# Altium PCB ultrazohm_digital_voltage_3U_1vxx.PcbDoc (part 1 of 4)
Units mm, origin at the board's own origin, x right, y up, seen from the top; angles counter-clockwise.
Board outline 155.99 x 100 mm, 4 copper layers (Top Layer, Layer 1, Layer 2, Bottom Layer), stack 0.98 mm thick; 148 components, 295 nets, 1106 pads, 423 vias.
Unrouted connection lines stored in the file: 171.
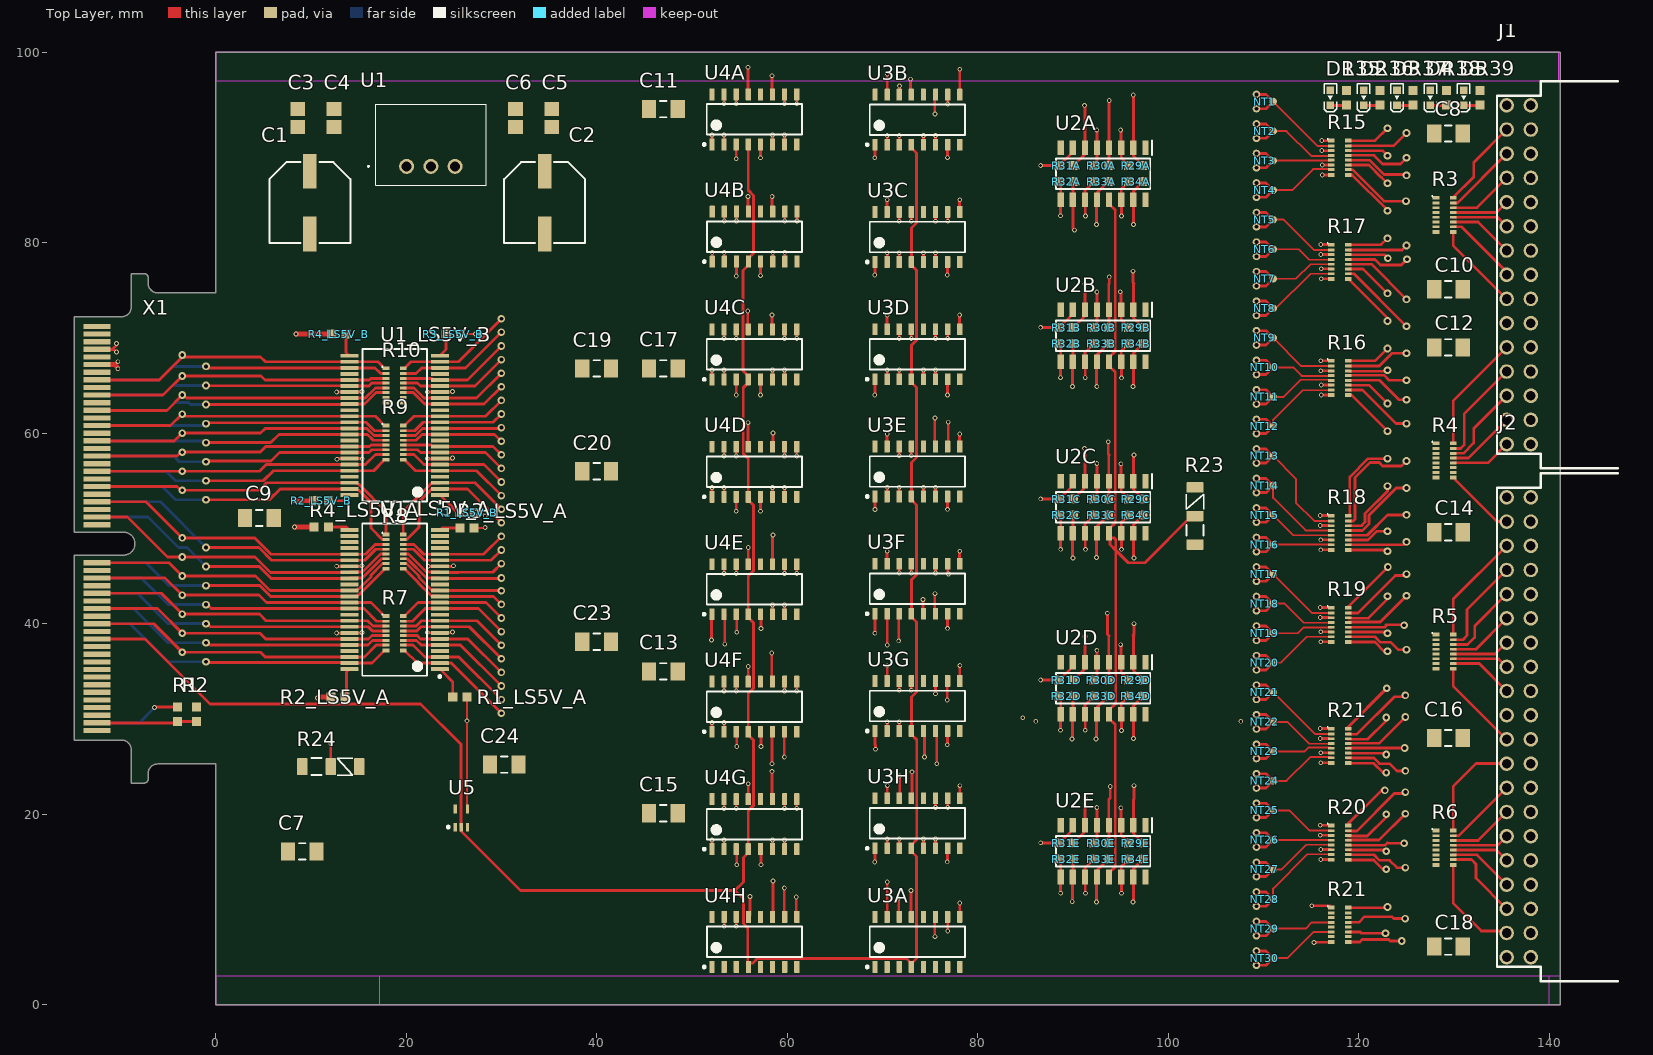
[diagram p0: Top Layer view]
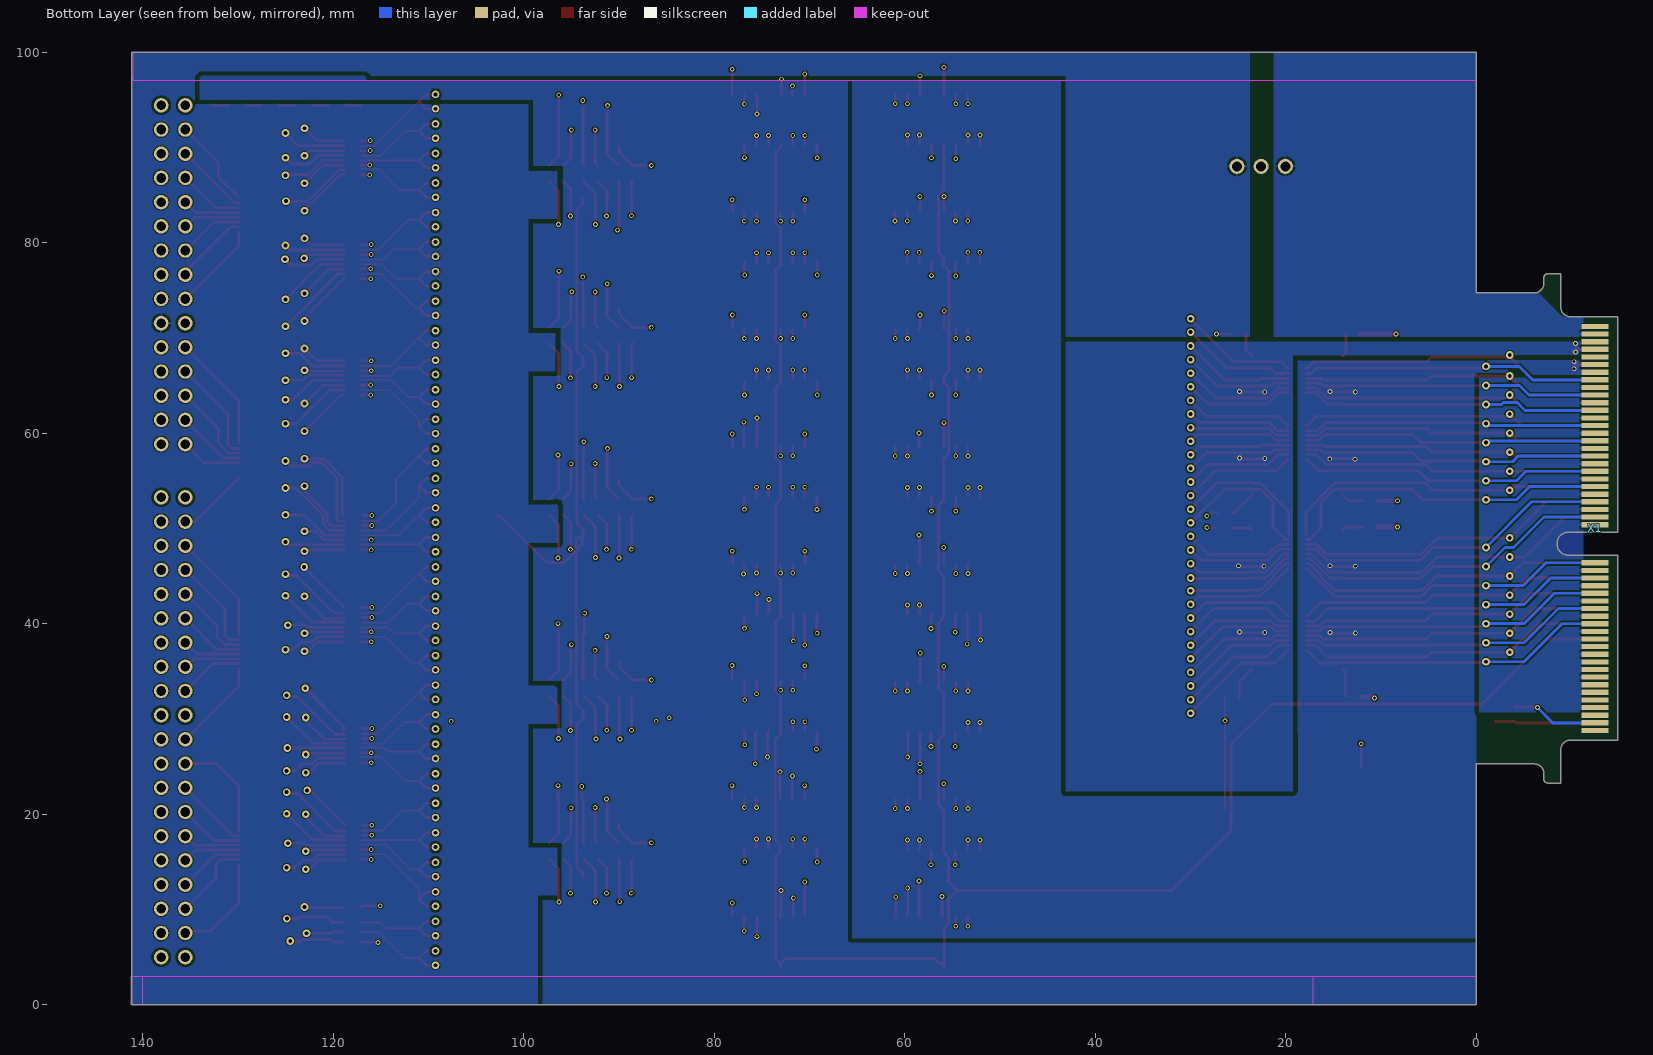
[diagram p1: Bottom Layer view, seen from below]
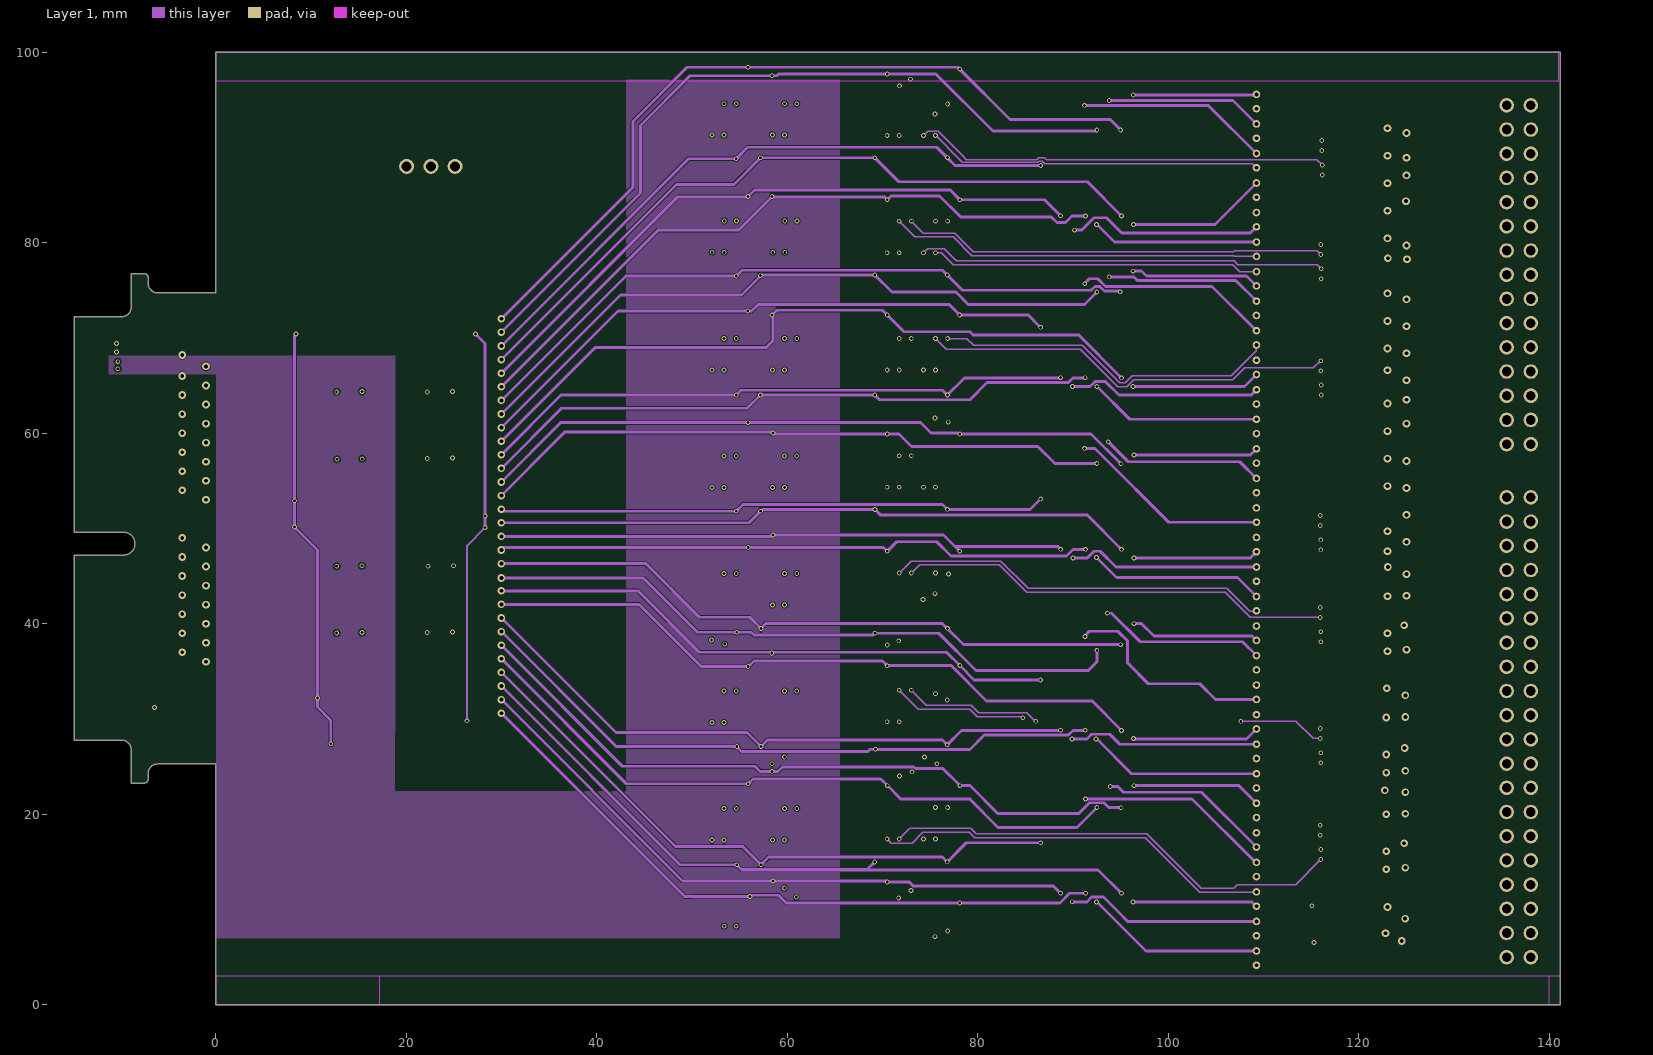
[diagram p2: Layer 1]
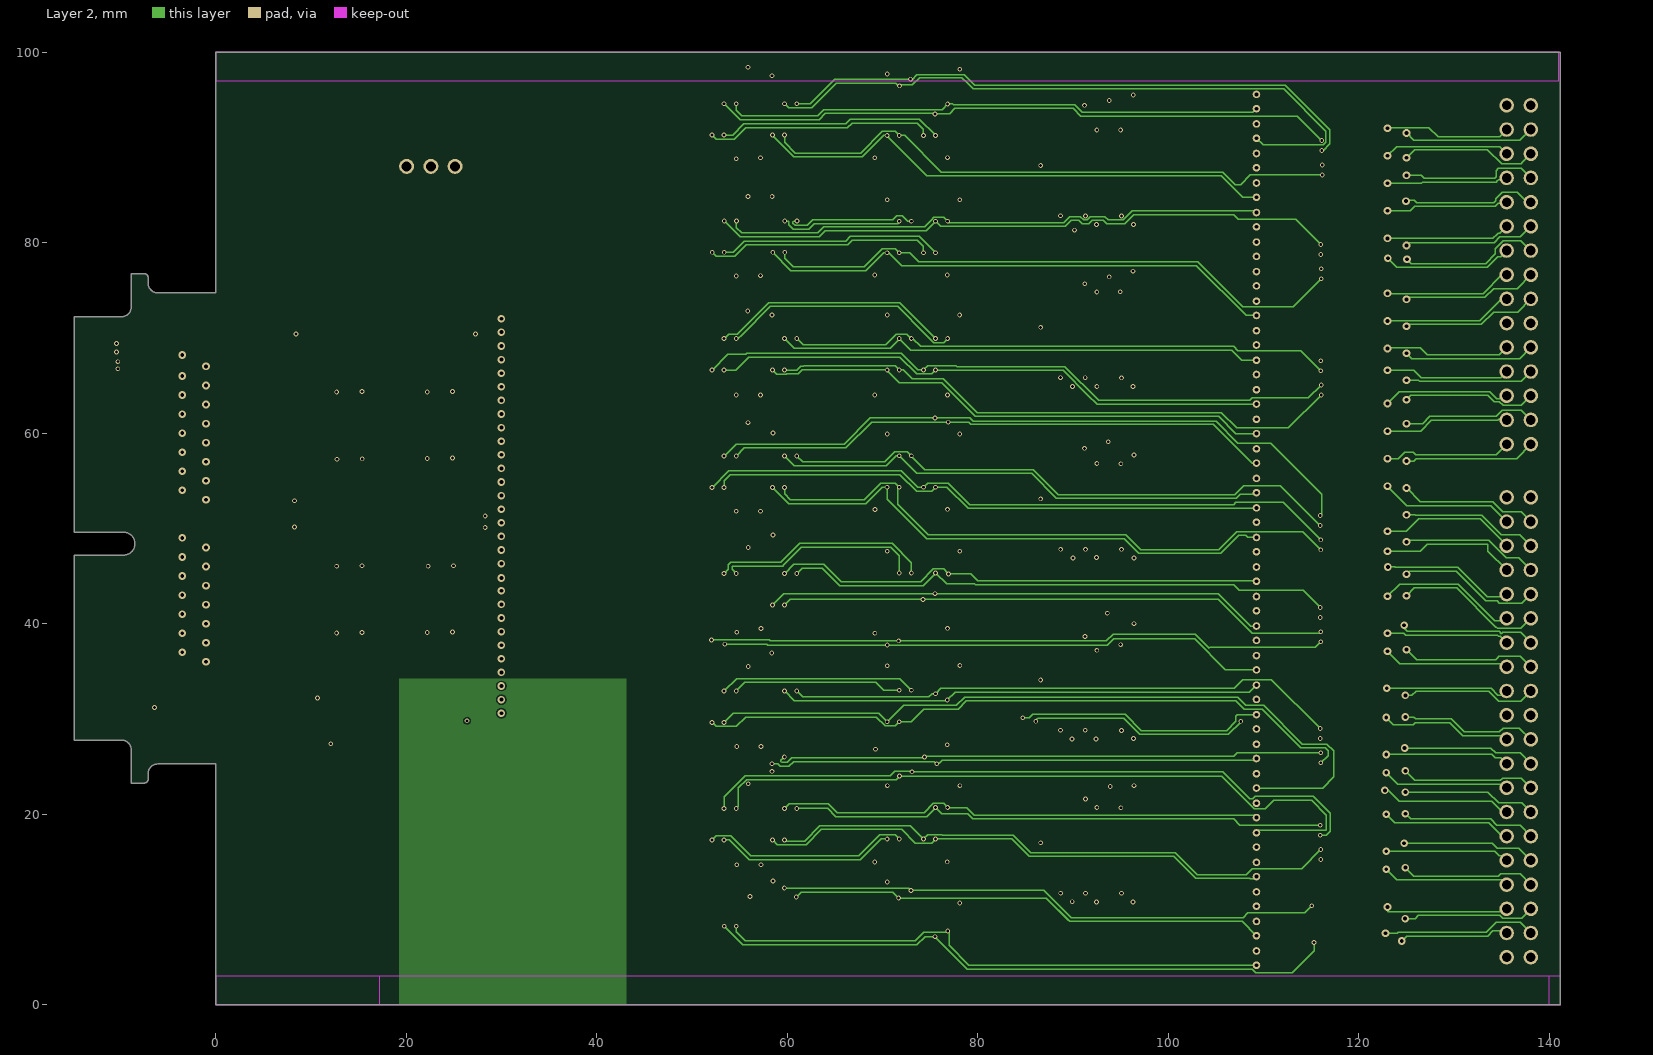
[diagram p3: Layer 2]
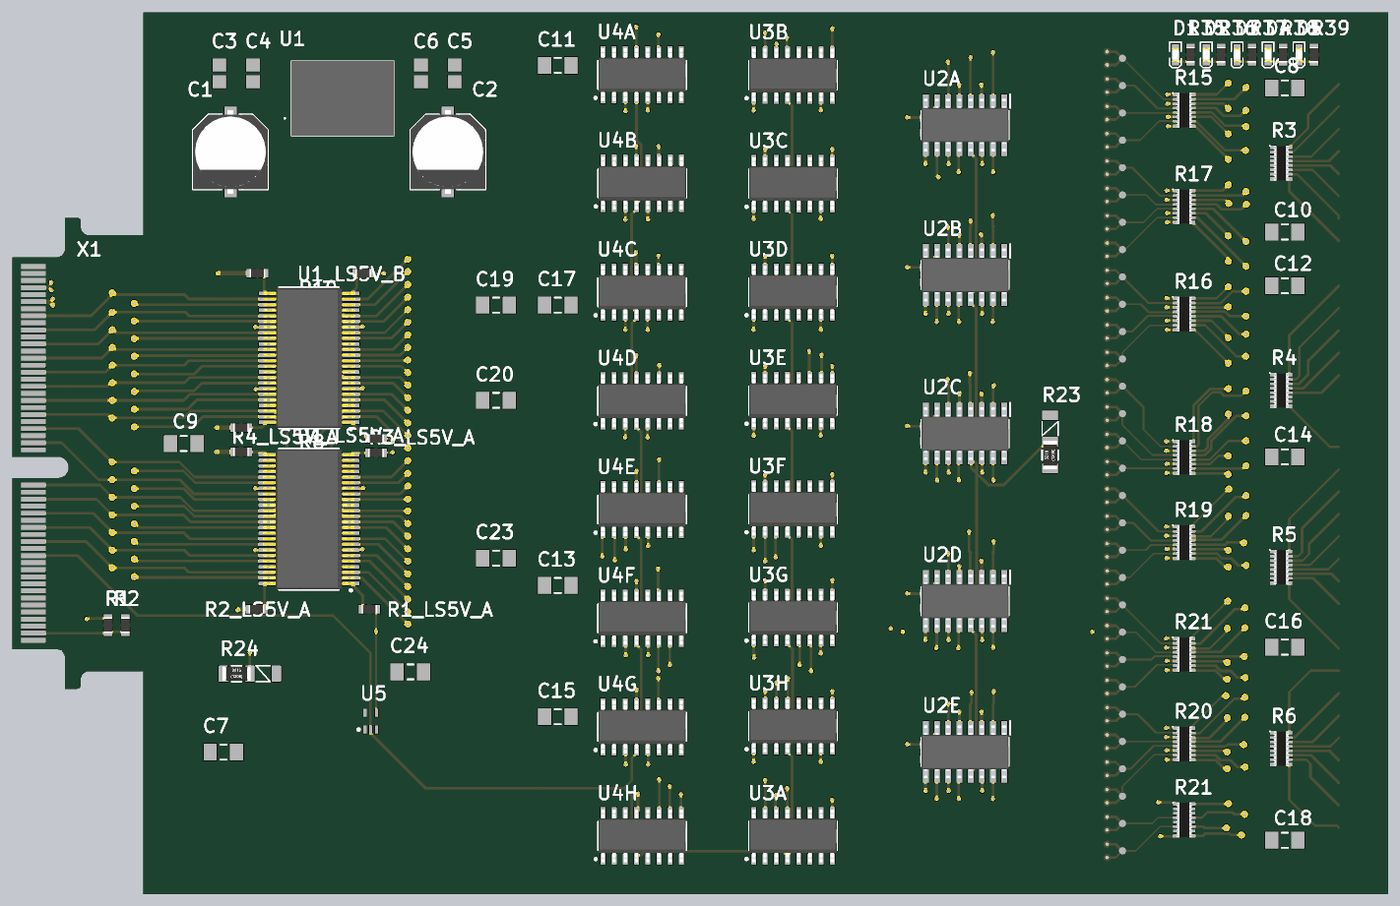
[diagram p6: 3D render of the assembled board from above, using the file's embedded part models]

## Layer stack, top to bottom
Top Solder: solder mask 0.0102, Solder Resist, Dk 3.5
Top Layer: signal copper 0.035
Dielectric 2: prepreg 0.115, FR-4, Dk 4.4
Dielectric 4: prepreg 0.115, FR-4, Dk 4.4
Layer 1: signal copper 0.035
Dielectric 1: core 0.38, Core-036, Dk 4.4
Layer 2: signal copper 0.035
Dielectric 5: prepreg 0.115, FR-4, Dk 4.4
Dielectric 3: prepreg 0.115, FR-4, Dk 4.4
Bottom Layer: signal copper 0.035
Bottom Solder: solder mask 0.0102, Solder Resist, Dk 3.5

## Board outline
-14.853,27.775 -9.853,27.775 cw(c-9.853,26.775) -8.853,26.775 -8.853,23.275 -7.473,23.275 ccw(c-7.473,23.675) -7.073,23.675 -7.073,24.275 cw(c-6.073,24.275) -6.073,25.275 0,25.275 0,0 141.141,0 141.141,100 0.031,100 0.031,74.725 -6.073,74.725 cw(c-6.073,75.725) -7.073,75.725 -7.073,76.325 ccw(c-7.473,76.325) -7.473,76.725 -8.853,76.725 -8.853,73.225 cw(c-9.853,73.225) -9.853,72.225 -14.853,72.225 -14.853,49.6 -9.653,49.6 cw(c-9.653,48.4) -9.653,47.2 -14.853,47.2

## Design rules (kind name [scope] priority, off if disabled: settings)
AssemblyTestPointUsage [InNetClass('3V3_SingleEnded') or InNetClass('5V_SingleEnded') or InNetClass('15V_SingleEnded') or InNetClass('DifferentialSignals')] p1:
Clearance Clearance_Differential [InNetClass('DifferentialSignals')] p1: gap=0.1 ignorepadtopadclearanceinfootprint=FALSE except(0: Arc-Hole Track-Hole SMDPad-Hole THPad-Hole Via-Hole Fill-Hole Poly-Hole Region-Hole Text-Hole; 0.3: SMDPad-Via; 0.4: THPad-Via)
Clearance Clearance_Power [InNetClass('Power')] p2: gap=0.1 ignorepadtopadclearanceinfootprint=FALSE except(0: Arc-Hole Track-Hole SMDPad-Hole THPad-Hole Via-Hole Fill-Hole Poly-Hole Region-Hole Text-Hole; 0.15: Via-Poly; 0.2: Track-Poly; 0.25: THPad-Poly; 0.3: Fill-Poly Poly-Region; 0.5: Poly-Poly)
Clearance [All] p3: gap=0.1 ignorepadtopadclearanceinfootprint=FALSE except(0: Arc-Hole Track-Hole SMDPad-Hole THPad-Hole Via-Hole Fill-Hole Poly-Hole Region-Hole Text-Hole; 0.3: SMDPad-Via; 0.4: THPad-Via)
ComponentClearance [All] p1: gap=0.1 collisioncheckmode=3 verticalgap=0.1 showdistances=FALSE
DiffPairsRouting [InNetClass('DifferentialSignals')] p1: maxlimit=0.25 minlimit=0.127 mostfreqgap=0.25 toplayer_maxgap=0.127 toplayer_prefgap=0.127 toplayer_minwidth=0.285 toplayer_maxwidth=0.285 toplayer_prefwidth=0.285 midlayer1_minwidth=0.069 midlayer1_maxwidth=0.15 midlayer1_prefwidth=0.15 midlayer2_mingap=0.165 midlayer2_minwidth=0.1 midlayer2_maxwidth=0.15 midlayer2_prefwidth=0.15 bottomlayer_maxgap=0.127 bottomlayer_prefgap=0.127 bottomlayer_minwidth=0.285 bottomlayer_maxwidth=0.285 bottomlayer_prefwidth=0.285 impedanceprofiledriven=TRUE impedanceprofileid={5F7DE71B-7B0B-4CDE-8AE7-8AD61221F3A5} impedanceprofilevalue=100.000000 maxuncoupledlength=12.7
FanoutControl Fanout_Power [InNetClass('Power') or InNet('ENABLE')] p1: bgadir=Out bgaviamode=Centered fanoutstyle=Auto fanoutdirection=None viagrid=0.025
FanoutControl Fanout_RS422 [InNetClass('DifferentialSignals')] p2: bgadir=Out bgaviamode=Closest fanoutstyle=Rows fanoutdirection=OutOnly viagrid=0.025
FanoutControl Fanout_BGA [IsBGA] p3 off: bgadir=Out bgaviamode=Centered fanoutstyle=Auto fanoutdirection=Alternating viagrid=0.025 // Fanout_BGA (Default Rule)
FanoutControl Fanout_LCC [IsLCC] p4 off: bgadir=Out bgaviamode=Centered fanoutstyle=Auto fanoutdirection=Alternating viagrid=0.025 // Fanout_LCC (Default Rule)
FanoutControl Fanout_SOIC [IsSOIC] p5 off: bgadir=Out bgaviamode=Centered fanoutstyle=Auto fanoutdirection=Alternating viagrid=0.025 // Fanout_SOIC (Default Rule)
FanoutControl Fanout_Small [(CompPinCount < 5)] p6 off: bgadir=Out bgaviamode=Centered fanoutstyle=Auto fanoutdirection=OutThenIn viagrid=0.025 // Fanout_Small (Default Rule)
FanoutControl Fanout_Default [All] p7: bgadir=NE bgaviamode=Closest fanoutstyle=Rows fanoutdirection=InOnly viagrid=0.025 // Fanout_Default (Default Rule)
Height [All] p1: minheight=0 maxheight=50 prefheight=12.7
HoleSize [All] p1: absolutevalues=TRUE maxlimit=4 minlimit=0.025 maxpercent=80.000 minpercent=20.000
PolygonConnect PolygonConnect_Therm [HoleSize > 2.6] p1: connectstyle=Direct reliefconductorwidth=0.254 reliefentries=4 polygonreliefangle="90 Angle" airgapwidth=0.254
PolygonConnect PolygonConnect_via [InPadClass('pad') or IsVia] p2: connectstyle=Direct reliefconductorwidth=0.254 reliefentries=4 polygonreliefangle="90 Angle" airgapwidth=0.254
PolygonConnect [All] p3: connectstyle=Relief reliefconductorwidth=0.2 reliefentries=4 polygonreliefangle="90 Angle" airgapwidth=0.25
RoomDefinition [InComponentClass('LS15VA') vs False] p1: confinementstyle=ConfineIn formatcopy=TRUE lockcomponents=FALSE outline 86,81 98.5,81 98.5,93.6 86,93.6
RoomDefinition RoomDefinition_4 [InComponentClass('LS15VE') vs False] p2: confinementstyle=ConfineIn formatcopy=TRUE lockcomponents=FALSE outline 86,9.9 98.5,9.9 98.5,22.5 86,22.5
RoomDefinition RoomDefinition_3 [InComponentClass('LS15VD') vs False] p3: confinementstyle=ConfineIn formatcopy=TRUE lockcomponents=FALSE outline 86,27 98.5,27 98.5,39.6 86,39.6
RoomDefinition RoomDefinition_2 [InComponentClass('LS15VC') vs False] p4: confinementstyle=ConfineIn formatcopy=TRUE lockcomponents=FALSE outline 86,46 98.5,46 98.5,58.6 86,58.6
RoomDefinition RoomDefinition_1 [InComponentClass('LS15VB') vs False] p5: confinementstyle=ConfineIn formatcopy=TRUE lockcomponents=FALSE outline 86,64 98.5,64 98.5,76.6 86,76.6
RoomDefinition RS422 [InComponentClass('Room Definition 11')] p6: confinementstyle=ConfineIn formatcopy=TRUE lockcomponents=FALSE outline 50.776,2.739 79.176,2.739 79.176,96.939 50.776,96.939
RoomDefinition X2_OutputConnector [InComponentClass('X2_OutputConnector')] p7: confinementstyle=ConfineIn formatcopy=TRUE lockcomponents=FALSE outline 129.17,2.264 147.966,2.264 147.966,97.006 129.17,97.006
RoomDefinition X1_top [InComponentClass('X1_top')] p8: confinementstyle=ConfineIn formatcopy=TRUE lockcomponents=FALSE outline -19.05,21.59 3.81,21.59 3.81,79.756 -19.05,79.756
RoomDefinition LS5V_B [InComponentClass('LS5V_B')] p9: confinementstyle=ConfineIn formatcopy=TRUE lockcomponents=FALSE outline 29.21,71.628 8.128,71.628 8.128,50.7 29.21,50.7
RoomDefinition LS5V_A [InComponentClass('LS5V_A')] p10: confinementstyle=ConfineIn formatcopy=TRUE lockcomponents=FALSE outline 29.464,51.61 7.112,51.61 7.112,30.85 29.464,30.85
RoomDefinition PS1 [InComponentClass('PS1')] p11: confinementstyle=ConfineIn formatcopy=TRUE lockcomponents=FALSE outline 4.319,78.157 39.879,78.157 39.879,95.937 4.319,95.937
RoutingLayers RoutingLayers_3V3Signals [InNetClass('3V3_SingleEnded')] p1 off: top layer_v5=TRUE mid layer 1_v5=TRUE mid layer 2_v5=TRUE bottom layer_v5=TRUE
RoutingLayers RoutingLayers_SingleEnded [InNetClass('15V_SingleEnded') or InNetClass('3V3_SingleEnded') or InNetClass('5V_SingleEnded')] p2 off: top layer_v5=TRUE mid layer 1_v5=TRUE mid layer 2_v5=TRUE bottom layer_v5=TRUE
RoutingLayers RoutingLayers_Differential [InNetClass('DifferentialSignals')] p3 off: top layer_v5=TRUE mid layer 1_v5=TRUE mid layer 2_v5=TRUE bottom layer_v5=FALSE
RoutingLayers [All] p4: top layer_v5=TRUE mid layer 1_v5=TRUE mid layer 2_v5=TRUE bottom layer_v5=TRUE
RoutingVias [All] p1: holewidth=0.3 width=0.5 viastyle="Through Hole" minholewidth=0.2 minwidth=0.4 maxholewidth=0.5 maxwidth=1
SolderMaskExpansion [All] p1: expansion=0.102
UnRoutedNet UnRoutedNet_Signals [InNetClass('15V_SingleEnded') or InNetClass('3V3_SingleEnded') or InNetClass('5V_SingleEnded') or InNetClass('DifferentialSignals')] p1: checkbadconnections=TRUE
UnRoutedNet [All] p2 off: checkbadconnections=TRUE
Width Width_Power [All] p1: maxlimit=10 minlimit=0.2 preferedwidth=0.3 minimp=50.000000 maximp=50.000000 favimp=50.000000
Width [All] p2: maxlimit=10 minlimit=0.1 preferedwidth=0.15 minimp=50.000000 maximp=50.000000 favimp=50.000000
18 further rules are at their usual default settings.

## Classes and differential pairs
component class LEDs: D1 D2 D3 D4 D5 R35 R36 R37 R38 R39
component class LS15VE: R29E R30E R31E R32E R33E R34E U2E
component class LS15VD: R29D R30D R31D R32D R33D R34D U2D
component class LS15VC: R29C R30C R31C R32C R33C R34C U2C
component class LS15VB: R29B R30B R31B R32B R33B R34B U2B
component class LS15VA: R29A R30A R31A R32A R33A R34A U2A
net class Power: 3V3 5V0 15V0 GND VIN
net class 15V_SingleEnded: DIG_O_15V_A1 DIG_O_15V_A2 DIG_O_15V_A3 DIG_O_15V_A4 DIG_O_15V_A5 DIG_O_15V_B1 DIG_O_15V_B2 DIG_O_15V_B3 DIG_O_15V_B4 DIG_O_15V_B5 DIG_O_15V_C1 DIG_O_15V_C2 DIG_O_15V_C3 DIG_O_15V_C4 DIG_O_15V_C5 DIG_O_15V_D1 DIG_O_15V_D2 DIG_O_15V_D3 DIG_O_15V_D4 DIG_O_15V_D5 DIG_O_15V_E1 DIG_O_15V_E2 DIG_O_15V_E3 DIG_O_15V_E4 DIG_O_15V_E5 DIG_O_15V_F1 DIG_O_15V_F2 DIG_O_15V_F3 DIG_O_15V_F4 DIG_O_15V_F5
net class 5V_SingleEnded: DIG_IO_5V_A1 DIG_IO_5V_A2 DIG_IO_5V_A3 DIG_IO_5V_A4 DIG_IO_5V_A5 DIG_IO_5V_B1 DIG_IO_5V_B2 DIG_IO_5V_B3 DIG_IO_5V_B4 DIG_IO_5V_B5 DIG_IO_5V_C1 DIG_IO_5V_C2 DIG_IO_5V_C3 DIG_IO_5V_C4 DIG_IO_5V_C5 DIG_IO_5V_D1 DIG_IO_5V_D2 DIG_IO_5V_D3 DIG_IO_5V_D4 DIG_IO_5V_D5 DIG_IO_5V_E1 DIG_IO_5V_E2 DIG_IO_5V_E3 DIG_IO_5V_E4 DIG_IO_5V_E5 DIG_IO_5V_F1 DIG_IO_5V_F2 DIG_IO_5V_F3 DIG_IO_5V_F4 DIG_IO_5V_F5
net class 3V3_SingleEnded: 1A1A 1A1B 1A2A 1A2B 1A3A 1A3B 1A4A 1A4B 1A5A 1A5B 1A6A 1A6B 1A7A 1A7B 1A8A 1A8B 2A1A 2A1B 2A2A 2A2B 2A3A 2A3B 2A4A 2A4B 2A5A 2A5B 2A6A 2A6B 2A7A 2A7B 2A8A 2A8B
net class DifferentialSignals: DIG_I_DIFF_A_N1 DIG_I_DIFF_A_N2 DIG_I_DIFF_A_N3 DIG_I_DIFF_A_N4 DIG_I_DIFF_A_N5 DIG_I_DIFF_A_N6 DIG_I_DIFF_A_N7 DIG_I_DIFF_A_N8 DIG_I_DIFF_A_P1 DIG_I_DIFF_A_P2 DIG_I_DIFF_A_P3 DIG_I_DIFF_A_P4 DIG_I_DIFF_A_P5 DIG_I_DIFF_A_P6 DIG_I_DIFF_A_P7 DIG_I_DIFF_A_P8 DIG_I_DIFF_B_N1 DIG_I_DIFF_B_N2 DIG_I_DIFF_B_N3 DIG_I_DIFF_B_N4 DIG_I_DIFF_B_N5 DIG_I_DIFF_B_N6 DIG_I_DIFF_B_N7 DIG_I_DIFF_B_P1 DIG_I_DIFF_B_P2 DIG_I_DIFF_B_P3 DIG_I_DIFF_B_P4 DIG_I_DIFF_B_P5 DIG_I_DIFF_B_P6 DIG_I_DIFF_B_P7 DIG_I_DIFF_C_N1 DIG_I_DIFF_C_N2 DIG_I_DIFF_C_N3 DIG_I_DIFF_C_N4 DIG_I_DIFF_C_N5 DIG_I_DIFF_C_N6 DIG_I_DIFF_C_N7 DIG_I_DIFF_C_N8 DIG_I_DIFF_C_P1 DIG_I_DIFF_C_P2 DIG_I_DIFF_C_P3 DIG_I_DIFF_C_P4 DIG_I_DIFF_C_P5 DIG_I_DIFF_C_P6 DIG_I_DIFF_C_P7 DIG_I_DIFF_C_P8 DIG_I_DIFF_D_N1 DIG_I_DIFF_D_N2 DIG_I_DIFF_D_N3 DIG_I_DIFF_D_N4 DIG_I_DIFF_D_N5 DIG_I_DIFF_D_N6 DIG_I_DIFF_D_N7 DIG_I_DIFF_D_P1 DIG_I_DIFF_D_P2 DIG_I_DIFF_D_P3 DIG_I_DIFF_D_P4 DIG_I_DIFF_D_P5 DIG_I_DIFF_D_P6 DIG_I_DIFF_D_P7 DIG_IO_N1 DIG_IO_N2 DIG_IO_N3 DIG_IO_N4 DIG_IO_N5 DIG_IO_N6 DIG_IO_N7 DIG_IO_N8 DIG_IO_N9 DIG_IO_N10 DIG_IO_N11 DIG_IO_N12 DIG_IO_N13 DIG_IO_N14 DIG_IO_N15 DIG_IO_N16 DIG_IO_N17 DIG_IO_N18 DIG_IO_N19 DIG_IO_N20 DIG_IO_N21 DIG_IO_N22 DIG_IO_N23 DIG_IO_N24 DIG_IO_N25 DIG_IO_N26 DIG_IO_N27 DIG_IO_N28 DIG_IO_N29 DIG_IO_N30 DIG_IO_P1 DIG_IO_P2 DIG_IO_P3 DIG_IO_P4 DIG_IO_P5 DIG_IO_P6 DIG_IO_P7 DIG_IO_P8 DIG_IO_P9 DIG_IO_P10 DIG_IO_P11 DIG_IO_P12 DIG_IO_P13 DIG_IO_P14 DIG_IO_P15 DIG_IO_P16 DIG_IO_P17 DIG_IO_P18 DIG_IO_P19 DIG_IO_P20 DIG_IO_P21 DIG_IO_P22 DIG_IO_P23 DIG_IO_P24 DIG_IO_P25 DIG_IO_P26 DIG_IO_P27 DIG_IO_P28 DIG_IO_P29 DIG_IO_P30
channel class TI_DS26C32AT: RS422_rec_H RS422_recA RS422_recB RS422_recC RS422_recD RS422_recE RS422_recF RS422_recG
net class UNTERM[1..30]: UNTERM1 UNTERM2 UNTERM3 UNTERM4 UNTERM5 UNTERM6 UNTERM7 UNTERM8 UNTERM9 UNTERM10 UNTERM11 UNTERM12 UNTERM13 UNTERM14 UNTERM15 UNTERM16 UNTERM17 UNTERM18 UNTERM19 UNTERM20 UNTERM21 UNTERM22 UNTERM23 UNTERM24 UNTERM25 UNTERM26 UNTERM27 UNTERM28 UNTERM29 UNTERM30
net class DIG_O_15V_F[1..5]: DIG_O_15V_F1 DIG_O_15V_F2 DIG_O_15V_F3 DIG_O_15V_F4 DIG_O_15V_F5
net class DIG_O_15V_E[1..5]: DIG_O_15V_E1 DIG_O_15V_E2 DIG_O_15V_E3 DIG_O_15V_E4 DIG_O_15V_E5
net class DIG_O_15V_D[1..5]: DIG_O_15V_D1 DIG_O_15V_D2 DIG_O_15V_D3 DIG_O_15V_D4 DIG_O_15V_D5
net class DIG_O_15V_C[1..5]: DIG_O_15V_C1 DIG_O_15V_C2 DIG_O_15V_C3 DIG_O_15V_C4 DIG_O_15V_C5
net class DIG_O_15V_B[1..5]: DIG_O_15V_B1 DIG_O_15V_B2 DIG_O_15V_B3 DIG_O_15V_B4 DIG_O_15V_B5
net class DIG_O_15V_A[1..5]: DIG_O_15V_A1 DIG_O_15V_A2 DIG_O_15V_A3 DIG_O_15V_A4 DIG_O_15V_A5
net class DIG_IO_P[1..30]: DIG_IO_P1 DIG_IO_P2 DIG_IO_P3 DIG_IO_P4 DIG_IO_P5 DIG_IO_P6 DIG_IO_P7 DIG_IO_P8 DIG_IO_P9 DIG_IO_P10 DIG_IO_P11 DIG_IO_P12 DIG_IO_P13 DIG_IO_P14 DIG_IO_P15 DIG_IO_P16 DIG_IO_P17 DIG_IO_P18 DIG_IO_P19 DIG_IO_P20 DIG_IO_P21 DIG_IO_P22 DIG_IO_P23 DIG_IO_P24 DIG_IO_P25 DIG_IO_P26 DIG_IO_P27 DIG_IO_P28 DIG_IO_P29 DIG_IO_P30
net class DIG_IO_N[1..30]: DIG_IO_N1 DIG_IO_N2 DIG_IO_N3 DIG_IO_N4 DIG_IO_N5 DIG_IO_N6 DIG_IO_N7 DIG_IO_N8 DIG_IO_N9 DIG_IO_N10 DIG_IO_N11 DIG_IO_N12 DIG_IO_N13 DIG_IO_N14 DIG_IO_N15 DIG_IO_N16 DIG_IO_N17 DIG_IO_N18 DIG_IO_N19 DIG_IO_N20 DIG_IO_N21 DIG_IO_N22 DIG_IO_N23 DIG_IO_N24 DIG_IO_N25 DIG_IO_N26 DIG_IO_N27 DIG_IO_N28 DIG_IO_N29 DIG_IO_N30
net class DIG_I_DIFF_D_P[1..7]: DIG_I_DIFF_D_P1 DIG_I_DIFF_D_P2 DIG_I_DIFF_D_P3 DIG_I_DIFF_D_P4 DIG_I_DIFF_D_P5 DIG_I_DIFF_D_P6 DIG_I_DIFF_D_P7
net class DIG_I_DIFF_D_N[1..7]: DIG_I_DIFF_D_N1 DIG_I_DIFF_D_N2 DIG_I_DIFF_D_N3 DIG_I_DIFF_D_N4 DIG_I_DIFF_D_N5 DIG_I_DIFF_D_N6 DIG_I_DIFF_D_N7
net class DIG_I_DIFF_C_P[1..8]: DIG_I_DIFF_C_P1 DIG_I_DIFF_C_P2 DIG_I_DIFF_C_P3 DIG_I_DIFF_C_P4 DIG_I_DIFF_C_P5 DIG_I_DIFF_C_P6 DIG_I_DIFF_C_P7 DIG_I_DIFF_C_P8
net class DIG_I_DIFF_C_N[1..8]: DIG_I_DIFF_C_N1 DIG_I_DIFF_C_N2 DIG_I_DIFF_C_N3 DIG_I_DIFF_C_N4 DIG_I_DIFF_C_N5 DIG_I_DIFF_C_N6 DIG_I_DIFF_C_N7 DIG_I_DIFF_C_N8
net class DIG_I_DIFF_B_P[1..7]: DIG_I_DIFF_B_P1 DIG_I_DIFF_B_P2 DIG_I_DIFF_B_P3 DIG_I_DIFF_B_P4 DIG_I_DIFF_B_P5 DIG_I_DIFF_B_P6 DIG_I_DIFF_B_P7
net class DIG_I_DIFF_B_N[1..7]: DIG_I_DIFF_B_N1 DIG_I_DIFF_B_N2 DIG_I_DIFF_B_N3 DIG_I_DIFF_B_N4 DIG_I_DIFF_B_N5 DIG_I_DIFF_B_N6 DIG_I_DIFF_B_N7
net class DIG_I_DIFF_A_P[1..8]: DIG_I_DIFF_A_P1 DIG_I_DIFF_A_P2 DIG_I_DIFF_A_P3 DIG_I_DIFF_A_P4 DIG_I_DIFF_A_P5 DIG_I_DIFF_A_P6 DIG_I_DIFF_A_P7 DIG_I_DIFF_A_P8
net class DIG_I_DIFF_A_N[1..8]: DIG_I_DIFF_A_N1 DIG_I_DIFF_A_N2 DIG_I_DIFF_A_N3 DIG_I_DIFF_A_N4 DIG_I_DIFF_A_N5 DIG_I_DIFF_A_N6 DIG_I_DIFF_A_N7 DIG_I_DIFF_A_N8
channel class TI_DS26C31T: RS4221 RS4222 RS4223 RS4224 RS4225 RS4226 RS4227
channel class ONSEMI_MC14504BDR2G: LS15V1 LS15V2 LS15V3 LS15V4 LS15V5
net class DIG_IO_5V_F[1..5]: DIG_IO_5V_F1 DIG_IO_5V_F2 DIG_IO_5V_F3 DIG_IO_5V_F4 DIG_IO_5V_F5
net class DIG_IO_5V_E[1..5]: DIG_IO_5V_E1 DIG_IO_5V_E2 DIG_IO_5V_E3 DIG_IO_5V_E4 DIG_IO_5V_E5
net class DIG_IO_5V_D[1..5]: DIG_IO_5V_D1 DIG_IO_5V_D2 DIG_IO_5V_D3 DIG_IO_5V_D4 DIG_IO_5V_D5
net class DIG_IO_5V_C[1..5]: DIG_IO_5V_C1 DIG_IO_5V_C2 DIG_IO_5V_C3 DIG_IO_5V_C4 DIG_IO_5V_C5
net class DIG_IO_5V_B[1..5]: DIG_IO_5V_B1 DIG_IO_5V_B2 DIG_IO_5V_B3 DIG_IO_5V_B4 DIG_IO_5V_B5
net class DIG_IO_5V_A[1..5]: DIG_IO_5V_A1 DIG_IO_5V_A2 DIG_IO_5V_A3 DIG_IO_5V_A4 DIG_IO_5V_A5
component class LS5V_A: R1_LS5V_A R2_LS5V_A R3_LS5V_A R4_LS5V_A U1_LS5V_A U3
component class LS5V_B: R1_LS5V_B R2_LS5V_B R3_LS5V_B R4_LS5V_B R26 U1_LS5V_B
channel class TI_SN74LVCH16T245: LevelShifter_3V3_1 LevelShifter_3V3_2
component class X1_top: R1 R2 X1
component class PS1: C1 C2 C3 C4 C5 C6 U1 U3
differential pair DIG_I_DIFF_C8: +DIG_I_DIFF_C_P8 -DIG_I_DIFF_C_N8
differential pair DIG_IO30: +DIG_IO_P30 -DIG_IO_N30
differential pair DIG_IO29: +DIG_IO_P29 -DIG_IO_N29
differential pair DIG_IO28: +DIG_IO_P28 -DIG_IO_N28
differential pair DIG_IO27: +DIG_IO_P27 -DIG_IO_N27
differential pair DIG_IO26: +DIG_IO_P26 -DIG_IO_N26
differential pair DIG_IO25: +DIG_IO_P25 -DIG_IO_N25
differential pair DIG_IO24: +DIG_IO_P24 -DIG_IO_N24
differential pair DIG_IO23: +DIG_IO_P23 -DIG_IO_N23
differential pair DIG_IO22: +DIG_IO_P22 -DIG_IO_N22
differential pair DIG_IO21: +DIG_IO_P21 -DIG_IO_N21
differential pair DIG_IO20: +DIG_IO_P20 -DIG_IO_N20
differential pair DIG_IO19: +DIG_IO_P19 -DIG_IO_N19
differential pair DIG_IO18: +DIG_IO_P18 -DIG_IO_N18
differential pair DIG_IO17: +DIG_IO_P17 -DIG_IO_N17
differential pair DIG_IO16: +DIG_IO_P16 -DIG_IO_N16
differential pair DIG_IO15: +DIG_IO_P15 -DIG_IO_N15
differential pair DIG_IO14: +DIG_IO_P14 -DIG_IO_N14
differential pair DIG_IO13: +DIG_IO_P13 -DIG_IO_N13
differential pair DIG_IO12: +DIG_IO_P12 -DIG_IO_N12
differential pair DIG_IO11: +DIG_IO_P11 -DIG_IO_N11
differential pair DIG_IO10: +DIG_IO_P10 -DIG_IO_N10
differential pair DIG_IO9: +DIG_IO_P9 -DIG_IO_N9
differential pair DIG_IO8: +DIG_IO_P8 -DIG_IO_N8
differential pair DIG_IO7: +DIG_IO_P7 -DIG_IO_N7
differential pair DIG_IO6: +DIG_IO_P6 -DIG_IO_N6
differential pair DIG_IO5: +DIG_IO_P5 -DIG_IO_N5
differential pair DIG_IO4: +DIG_IO_P4 -DIG_IO_N4
differential pair DIG_IO3: +DIG_IO_P3 -DIG_IO_N3
differential pair DIG_IO2: +DIG_IO_P2 -DIG_IO_N2
differential pair DIG_IO1: +DIG_IO_P1 -DIG_IO_N1
differential pair DIG_I_DIFF_D7: +DIG_I_DIFF_D_P7 -DIG_I_DIFF_D_N7
differential pair DIG_I_DIFF_D6: +DIG_I_DIFF_D_P6 -DIG_I_DIFF_D_N6
differential pair DIG_I_DIFF_D5: +DIG_I_DIFF_D_P5 -DIG_I_DIFF_D_N5
differential pair DIG_I_DIFF_D4: +DIG_I_DIFF_D_P4 -DIG_I_DIFF_D_N4
differential pair DIG_I_DIFF_D3: +DIG_I_DIFF_D_P3 -DIG_I_DIFF_D_N3
differential pair DIG_I_DIFF_D2: +DIG_I_DIFF_D_P2 -DIG_I_DIFF_D_N2
differential pair DIG_I_DIFF_D1: +DIG_I_DIFF_D_P1 -DIG_I_DIFF_D_N1
differential pair DIG_I_DIFF_C7: +DIG_I_DIFF_C_P7 -DIG_I_DIFF_C_N7
differential pair DIG_I_DIFF_C6: +DIG_I_DIFF_C_P6 -DIG_I_DIFF_C_N6
differential pair DIG_I_DIFF_C5: +DIG_I_DIFF_C_P5 -DIG_I_DIFF_C_N5
differential pair DIG_I_DIFF_C4: +DIG_I_DIFF_C_P4 -DIG_I_DIFF_C_N4
differential pair DIG_I_DIFF_C3: +DIG_I_DIFF_C_P3 -DIG_I_DIFF_C_N3
differential pair DIG_I_DIFF_C2: +DIG_I_DIFF_C_P2 -DIG_I_DIFF_C_N2
differential pair DIG_I_DIFF_C1: +DIG_I_DIFF_C_P1 -DIG_I_DIFF_C_N1
differential pair DIG_I_DIFF_B7: +DIG_I_DIFF_B_P7 -DIG_I_DIFF_B_N7
differential pair DIG_I_DIFF_B6: +DIG_I_DIFF_B_P6 -DIG_I_DIFF_B_N6
differential pair DIG_I_DIFF_B5: +DIG_I_DIFF_B_P5 -DIG_I_DIFF_B_N5
differential pair DIG_I_DIFF_B4: +DIG_I_DIFF_B_P4 -DIG_I_DIFF_B_N4
differential pair DIG_I_DIFF_B3: +DIG_I_DIFF_B_P3 -DIG_I_DIFF_B_N3
differential pair DIG_I_DIFF_B2: +DIG_I_DIFF_B_P2 -DIG_I_DIFF_B_N2
differential pair DIG_I_DIFF_B1: +DIG_I_DIFF_B_P1 -DIG_I_DIFF_B_N1
differential pair DIG_I_DIFF_A8: +DIG_I_DIFF_A_P8 -DIG_I_DIFF_A_N8
differential pair DIG_I_DIFF_A7: +DIG_I_DIFF_A_P7 -DIG_I_DIFF_A_N7
differential pair DIG_I_DIFF_A6: +DIG_I_DIFF_A_P6 -DIG_I_DIFF_A_N6
differential pair DIG_I_DIFF_A5: +DIG_I_DIFF_A_P5 -DIG_I_DIFF_A_N5
differential pair DIG_I_DIFF_A4: +DIG_I_DIFF_A_P4 -DIG_I_DIFF_A_N4
differential pair DIG_I_DIFF_A3: +DIG_I_DIFF_A_P3 -DIG_I_DIFF_A_N3
differential pair DIG_I_DIFF_A2: +DIG_I_DIFF_A_P2 -DIG_I_DIFF_A_N2
differential pair DIG_I_DIFF_A1: +DIG_I_DIFF_A_P1 -DIG_I_DIFF_A_N1

## Components (designator, comment, footprint, x,y, rotation, side; value= is the part's Value field where it differs from the comment)
C1 "ALEL SMD" CAPAE9583X66L 9.9,84.19 r270 top value=47u
C2 "ALEL SMD" CAPAE9583X66L 34.538,84.19 r270 top value=47u
C3 "X7R SMD" CAPC2013X140X50ML15T20 8.63,93.08 r270 top value=100n
C4 "X7R SMD" CAPC2013X140X50ML15T20 12.44,93.08 r270 top value=100n
C5 "X7R SMD" CAPC2013X140X50ML15T20 35.3,93.08 r270 top value=100n
C6 "X7R SMD" CAPC2013X140X50ML15T20 31.49,93.08 r270 top value=100n
C7 "X7R SMD" CAPC3216X180X50ML20T25 9.1,16.1 r180 top value=100n
C8 "X7R SMD" CAPC3216X180X50ML20T25 129.4,91.44 r0 top value=100n
C9 "X7R SMD" CAPC3216X180X50ML20T25 4.6,51.1 r0 top value=100n
C10 "X7R SMD" CAPC3216X180X50ML20T25 129.4,75.1 r0 top value=100n
C11 "X7R SMD" CAPC3216X180X50ML20T25 47,94 r180 top value=100n
C12 "X7R SMD" CAPC3216X180X50ML20T25 129.4,69 r0 top value=100n
C13 "X7R SMD" CAPC3216X180X50ML20T25 47,35 r0 top value=100n
C14 "X7R SMD" CAPC3216X180X50ML20T25 129.4,49.6 r0 top value=100n
C15 "X7R SMD" CAPC3216X180X50ML20T25 47,20.1 r0 top value=100n
C16 "X7R SMD" CAPC3216X180X50ML20T25 129.4,28 r0 top value=100n
C17 "X7R SMD" CAPC3216X180X50ML20T25 47,66.8 r0 top value=100n
C18 "X7R SMD" CAPC3216X180X50ML20T25 129.4,6.1 r0 top value=100n
C19 "X7R SMD" CAPC3216X180X50ML20T25 40,66.8 r0 top value=100n
C20 "X7R SMD" CAPC3216X180X50ML20T25 40,56 r0 top value=100n
C23 "X7R SMD" CAPC3216X180X50ML20T25 40,38.1 r0 top value=100n
C24 "X7R SMD" CAPC3216X180X50ML20T25 30.3,25.2 r180 top value=100n
D1 "#NAME?" WL-SMCW_0603 117,95.2 r90 top value=150060AS75000
D2 "#NAME?" WL-SMCW_0603 120.5,95.2 r90 top value=150060BS75000
D3 "#NAME?" WL-SMCW_0603 124,95.2 r90 top value=150060GS75000
D4 "#NAME?" WL-SMCW_0603 127.5,95.2 r90 top value=150060RS75000
D5 "#NAME?" WL-SMCW_0603 131,95.2 r90 top value=150060YS75000
J1 "IPL1-115-01-XX-D-RA" IPL1-115-01-XX-D-RA 147.705,76.623 r270 top
J2 "IPL1-120-01-XX-D-RA" IPL1-120-01-XX-D-RA 147.705,29.125 r270 top
NT1 "NetTie_2_to_1" 2_to_1_NETTIE_TH 110,94.8 r0 top locked net-tie
NT2 "NetTie_2_to_1" 2_to_1_NETTIE_TH 110,91.7 r0 top locked net-tie
NT3 "NetTie_2_to_1" 2_to_1_NETTIE_TH 110,88.6 r0 top locked net-tie
NT4 "NetTie_2_to_1" 2_to_1_NETTIE_TH 110,85.5 r0 top locked net-tie
NT5 "NetTie_2_to_1" 2_to_1_NETTIE_TH 110,82.4 r0 top locked net-tie
NT6 "NetTie_2_to_1" 2_to_1_NETTIE_TH 110,79.3 r0 top locked net-tie
NT7 "NetTie_2_to_1" 2_to_1_NETTIE_TH 110,76.2 r0 top locked net-tie
NT8 "NetTie_2_to_1" 2_to_1_NETTIE_TH 110,73.1 r0 top locked net-tie
NT9 "NetTie_2_to_1" 2_to_1_NETTIE_TH 110,70 r0 top locked net-tie
NT10 "NetTie_2_to_1" 2_to_1_NETTIE_TH 110,66.9 r0 top locked net-tie
NT11 "NetTie_2_to_1" 2_to_1_NETTIE_TH 110,63.8 r0 top locked net-tie
NT12 "NetTie_2_to_1" 2_to_1_NETTIE_TH 110,60.7 r0 top locked net-tie
NT13 "NetTie_2_to_1" 2_to_1_NETTIE_TH 110,57.6 r0 top locked net-tie
NT14 "NetTie_2_to_1" 2_to_1_NETTIE_TH 110,54.5 r0 top locked net-tie
NT15 "NetTie_2_to_1" 2_to_1_NETTIE_TH 110,51.4 r0 top locked net-tie
NT16 "NetTie_2_to_1" 2_to_1_NETTIE_TH 110,48.3 r0 top locked net-tie
NT17 "NetTie_2_to_1" 2_to_1_NETTIE_TH 110,45.2 r0 top locked net-tie
NT18 "NetTie_2_to_1" 2_to_1_NETTIE_TH 110,42.1 r0 top locked net-tie
NT19 "NetTie_2_to_1" 2_to_1_NETTIE_TH 110,39 r0 top locked net-tie
NT20 "NetTie_2_to_1" 2_to_1_NETTIE_TH 110,35.9 r0 top locked net-tie
NT21 "NetTie_2_to_1" 2_to_1_NETTIE_TH 110,32.8 r0 top locked net-tie
NT22 "NetTie_2_to_1" 2_to_1_NETTIE_TH 110,29.7 r0 top locked net-tie
NT23 "NetTie_2_to_1" 2_to_1_NETTIE_TH 110,26.6 r0 top locked net-tie
NT24 "NetTie_2_to_1" 2_to_1_NETTIE_TH 110,23.5 r0 top locked net-tie
NT25 "NetTie_2_to_1" 2_to_1_NETTIE_TH 110,20.4 r0 top locked net-tie
NT26 "NetTie_2_to_1" 2_to_1_NETTIE_TH 110,17.3 r0 top locked net-tie
NT27 "NetTie_2_to_1" 2_to_1_NETTIE_TH 110,14.2 r0 top locked net-tie
NT28 "NetTie_2_to_1" 2_to_1_NETTIE_TH 110,11.1 r0 top locked net-tie
NT29 "NetTie_2_to_1" 2_to_1_NETTIE_TH 110,8 r0 top locked net-tie
NT30 "NetTie_2_to_1" 2_to_1_NETTIE_TH 110,4.9 r0 top locked net-tie
R1 "0.1W" RESC1608X55X30NL15T15 -4,30.5 r90 top value=0 (schematic designator R23)
R1_LS5V_A "0.1W" RESC1608X55X30NL15T15 25.65,32.3 r180 top value=10k (schematic designator R25)
R1_LS5V_B "0.1W" RESC1608X55X30NL15T15 26.4,51.65 r180 top value=10k (schematic designator R25)
R2 "0.1W" RESC1608X55X30NL15T15 -2,30.5 r270 top value=0 (schematic designator R24)
R2_LS5V_A "0.1W" RESC1608X55X30NL15T15 12.85,32.3 r0 top value=10k (schematic designator R26)
R2_LS5V_B "0.1W" RESC1608X55X30NL15T15 11.1,52.9 r0 top value=10k (schematic designator R26)
R3 "0.063W" RESCAXE-50P380X160X45-16N 129,82.909 r0 top
R3_LS5V_A "0.1W" RESC1608X55X30NL15T15 26.4,50.05 r0 top value=10k (schematic designator R27)
R3_LS5V_B "0.1W" RESC1608X55X30NL15T15 24.95,70.4 r0 top value=10k (schematic designator R27)
R4 "0.063W" RESCAXE-50P380X160X45-16N 129,57.128 r0 top
R4_LS5V_A "0.1W" RESC1608X55X30NL15T15 11.1,50.15 r180 top value=10k (schematic designator R28)
R4_LS5V_B "0.1W" RESC1608X55X30NL15T15 12.95,70.4 r180 top value=10k (schematic designator R28)
R5 "0.063W" RESCAXE-50P380X160X45-16N 129,37.062 r0 top
R6 "0.063W" RESCAXE-50P380X160X45-16N 129,16.488 r0 top
R7 "0.063W" RESCAXE-50P380X160X45-16N 18.796,39 r0 top
R8 "0.063W" RESCAXE-50P380X160X45-16N 18.796,47.567 r0 top
R9 "0.063W" RESCAXE-50P380X160X45-16N 18.796,59 r0 top
R10 "0.063W" RESCAXE-50P380X160X45-16N 18.796,65 r0 top
R15 "0.063W" RESCAXE-50P380X160X45-16N 118,88.9 r0 top
R16 "0.063W" RESCAXE-50P380X160X45-16N 118,65.786 r0 top
R17 "0.063W" RESCAXE-50P380X160X45-16N 118,77.978 r0 top
R18 "0.063W" RESCAXE-50P380X160X45-16N 118,49.53 r0 top
R19 "0.063W" RESCAXE-50P380X160X45-16N 118,39.878 r0 top
R20 "0.063W" RESCAXE-50P380X160X45-16N 118,17.018 r0 top
R21 "0.063W" RESCAXE-50P380X160X45-16N 118,8.4 r0 top
R21 "0.063W" RESCAXE-50P380X160X45-16N 118,27.178 r0 top (schematic designator R22)
R23 "0.5W" RESC3216X70X50LL20T25_CONFIG 102.8,51.3 r90 top value=0 (schematic designator R2)
R24 "0.1W" RESC3216X70X50LL20T25_CONFIG 12.1,25 r0 top value=0 (schematic designator R1)
R29A "0.1W" RESC1608X55X30NL15T15 96.6,88.075 r0 top value=? (schematic designator R29)
R29B "0.1W" RESC1608X55X30NL15T15 96.6,71.075 r0 top value=? (schematic designator R29)
R29C "0.1W" RESC1608X55X30NL15T15 96.6,53.075 r0 top value=? (schematic designator R29)
R29D "0.1W" RESC1608X55X30NL15T15 96.6,34.075 r0 top value=? (schematic designator R29)
R29E "0.1W" RESC1608X55X30NL15T15 96.6,16.975 r0 top value=? (schematic designator R29)
R30A "0.1W" RESC1608X55X30NL15T15 92.95,88.075 r0 top value=? (schematic designator R30)
R30B "0.1W" RESC1608X55X30NL15T15 92.95,71.075 r0 top value=? (schematic designator R30)
R30C "0.1W" RESC1608X55X30NL15T15 92.95,53.075 r0 top value=? (schematic designator R30)
R30D "0.1W" RESC1608X55X30NL15T15 92.95,34.075 r0 top value=? (schematic designator R30)
R30E "0.1W" RESC1608X55X30NL15T15 92.95,16.975 r0 top value=? (schematic designator R30)
R31A "0.1W" RESC1608X55X30NL15T15 89.3,88.075 r0 top value=? (schematic designator R31)
R31B "0.1W" RESC1608X55X30NL15T15 89.3,71.075 r0 top value=? (schematic designator R31)
R31C "0.1W" RESC1608X55X30NL15T15 89.3,53.075 r0 top value=? (schematic designator R31)
R31D "0.1W" RESC1608X55X30NL15T15 89.3,34.075 r0 top value=? (schematic designator R31)
R31E "0.1W" RESC1608X55X30NL15T15 89.3,16.975 r0 top value=? (schematic designator R31)
R32A "0.1W" RESC1608X55X30NL15T15 89.3,86.4 r0 top value=? (schematic designator R32)
R32B "0.1W" RESC1608X55X30NL15T15 89.3,69.4 r0 top value=? (schematic designator R32)
R32C "0.1W" RESC1608X55X30NL15T15 89.3,51.4 r0 top value=? (schematic designator R32)
R32D "0.1W" RESC1608X55X30NL15T15 89.3,32.4 r0 top value=? (schematic designator R32)
R32E "0.1W" RESC1608X55X30NL15T15 89.3,15.3 r0 top value=? (schematic designator R32)
R33A "0.1W" RESC1608X55X30NL15T15 92.95,86.4 r0 top value=? (schematic designator R33)
R33B "0.1W" RESC1608X55X30NL15T15 92.95,69.4 r0 top value=? (schematic designator R33)
R33C "0.1W" RESC1608X55X30NL15T15 92.95,51.4 r0 top value=? (schematic designator R33)
R33D "0.1W" RESC1608X55X30NL15T15 92.95,32.4 r0 top value=? (schematic designator R33)
R33E "0.1W" RESC1608X55X30NL15T15 92.95,15.3 r0 top value=? (schematic designator R33)
R34A "0.1W" RESC1608X55X30NL15T15 96.6,86.4 r0 top value=? (schematic designator R34)
R34B "0.1W" RESC1608X55X30NL15T15 96.6,69.4 r0 top value=? (schematic designator R34)
R34C "0.1W" RESC1608X55X30NL15T15 96.6,51.4 r0 top value=? (schematic designator R34)
R34D "0.1W" RESC1608X55X30NL15T15 96.6,32.4 r0 top value=? (schematic designator R34)
R34E "0.1W" RESC1608X55X30NL15T15 96.6,15.3 r0 top value=? (schematic designator R34)
R35 "0.1W" RESC1608X55X30NL15T15 118.7,95.2 r90 top value=2k7
R36 "0.1W" RESC1608X55X30NL15T15 122.2,95.2 r90 top value=1k5
R37 "0.1W" RESC1608X55X30NL15T15 125.7,95.2 r90 top value=1k5
R38 "0.1W" RESC1608X55X30NL15T15 129.2,95.2 r90 top value=2k7
R39 "0.1W" RESC1608X55X30NL15T15 132.7,95.2 r90 top value=2k7
U1 "R-78C15-1.0" R78C1510 20.06,88 r0 top (schematic designator U5)
U1_LS5V_A "SN74LVCH16T245" TI_DL-R-PDSO-G48_N 18.796,42.53 r180 top (schematic designator U6)
U1_LS5V_B "SN74LVCH16T245" TI_DL-R-PDSO-G48_N 18.808,60.818 r180 top (schematic designator U6)
U2A "MC14504BDR2G" SOIC127P600X175-16N 93.155,87.225 r270 top (schematic designator U2)
U2B "MC14504BDR2G" SOIC127P600X175-16N 93.155,70.225 r270 top (schematic designator U2)
U2C "MC14504BDR2G" SOIC127P600X175-16N 93.155,52.225 r270 top (schematic designator U2)
U2D "MC14504BDR2G" SOIC127P600X175-16N 93.155,33.225 r270 top (schematic designator U2)
U2E "MC14504BDR2G" SOIC127P600X175-16N 93.155,16.125 r270 top (schematic designator U2)
U3A "DS26C31T" TI_D-R-PDSO-G16_L 73.666,6.6 r90 top (schematic designator U3)
U3B "DS26C31T" TI_D-R-PDSO-G16_L 73.666,92.894 r90 top (schematic designator U3)
U3C "DS26C31T" TI_D-R-PDSO-G16_L 73.666,80.587 r90 top (schematic designator U3)
U3D "DS26C31T" TI_D-R-PDSO-G16_L 73.666,68.28 r90 top (schematic designator U3)
U3E "DS26C31T" TI_D-R-PDSO-G16_L 73.666,55.973 r90 top (schematic designator U3)
U3F "DS26C31T" TI_D-R-PDSO-G16_L 73.666,43.666 r90 top (schematic designator U3)
U3G "DS26C31T" TI_D-R-PDSO-G16_L 73.666,31.359 r90 top (schematic designator U3)
U3H "DS26C31T" TI_D-R-PDSO-G16_L 73.666,19.052 r90 top (schematic designator U3)
U4A "DS26LV32ATM" TI_D-R-PDSO-G16_L 56.555,92.925 r90 top (schematic designator U4)
U4B "DS26LV32ATM" TI_D-R-PDSO-G16_L 56.575,80.625 r90 top (schematic designator U4)
U4C "DS26LV32ATM" TI_D-R-PDSO-G16_L 56.555,68.269 r90 top (schematic designator U4)
U4D "DS26LV32ATM" TI_D-R-PDSO-G16_L 56.555,55.942 r90 top (schematic designator U4)
U4E "DS26LV32ATM" TI_D-R-PDSO-G16_L 56.555,43.614 r90 top (schematic designator U4)
U4F "DS26LV32ATM" TI_D-R-PDSO-G16_L 56.555,31.286 r90 top (schematic designator U4)
U4G "DS26LV32ATM" TI_D-R-PDSO-G16_L 56.555,18.958 r90 top (schematic designator U4)
U4H "DS26LV32ATM" TI_D-R-PDSO-G16_L 56.563,6.6 r90 top (schematic designator U4)
U5 "74AHC1G14GW,125" NXP-SOT353-1_N 25.8,19.6 r90 top (schematic designator U1)
X1 "HSEC8-150-01-XX-DV-A-BL-CARD" HSEC8-150-01-XX-DV-A-BL-CARD -14.84,49.991 r270 bottom

## Footprints (in the part's own frame and the unit in brackets; to place one, negate y for a bottom-side part, rotate by r counter-clockwise, add the part's x,y. Pads: shape width x height; smd on the part's side, far side on the other; paste and mask are expansions set on the pad)
2_to_1_NETTIE_TH [mm] "Net tie to merge 2 nets on different layers"
  round 0.8 hole 0.4 paste+0: 1(-0.75,0.75) 2(-0.75,-0.75)
  round 0.8 smd paste+0: 3(1,0)
  Top Layer lines w0.3: -0.75,-0.75 0.25,-0.75 1,0 0.25,0.75 -0.75,0.75
CAPAE9583X66L [mm] "ELKO Panasonic S-Series, V-Type, Size E, High Density"
  rect 3.65x1.4 smd: 1(-3.3,0) 2(3.3,0)
  silkscreen extent -4.25,-4.25 4.25,4.25, body extent -4.75,-4.25 4.75,4.25, height 6.6
CAPC2013X140X50ML15T20 [mm] "Chip Capacitor, 2-Leads, Body 2.00x1.25mm, IPC Low Density"
  rect 1.45x1.55 smd: 1(-0.95,0) 2(0.95,0)
  body extent -1.08,-0.7 1.07,0.7, height 1.4
CAPC3216X180X50ML20T25 [mm] "Chip Capacitor, 2-Leads, Body 3.20x1.60mm, IPC Low Density"
  rect 1.5x1.9 smd: 1(-1.5,0) 2(1.5,0)
  silkscreen extent -0.35,-0.85 0.35,0.85, body extent -1.7,-0.9 1.7,0.9, height 1.8
HSEC8-150-01-XX-DV-A-BL-CARD [mm]
  rect 0.55x2.8 smd far side mask+0.05: 1(-21.2,-2.4) 3(-20.4,-2.4) 5(-19.6,-2.4) 7(-18.8,-2.4) 9(-18,-2.4) 11(-17.2,-2.4) 13(-16.4,-2.4) 15(-15.6,-2.4) 17(-14.8,-2.4) 19(-14,-2.4) 21(-13.2,-2.4) 23(-12.4,-2.4) 25(-11.6,-2.4) 27(-10.8,-2.4) 29(-10,-2.4) 31(-9.2,-2.4) 33(-8.4,-2.4) 35(-7.6,-2.4) 37(-6.8,-2.4) 39(-6,-2.4) 41(-5.2,-2.4) 43(-4.4,-2.4) 45(-3.6,-2.4) 47(-2.8,-2.4) 49(-2,-2.4) 51(-1.2,-2.4) 53(-0.4,-2.4) 55(3.6,-2.4) 57(4.4,-2.4) 59(5.2,-2.4) 61(6,-2.4) 63(6.8,-2.4) 65(7.6,-2.4) 67(8.4,-2.4) 69(9.2,-2.4) 71(10,-2.4) 73(10.8,-2.4) 75(11.6,-2.4) 77(12.4,-2.4) 79(13.2,-2.4) 81(14,-2.4) 83(14.8,-2.4) 85(15.6,-2.4) 87(16.4,-2.4) 89(17.2,-2.4) 91(18,-2.4) 93(18.8,-2.4) 95(19.6,-2.4) 97(20.4,-2.4) 99(21.2,-2.4)
  rect 0.55x2.8 smd mask+0.05: 2(-21.2,-2.4) 4(-20.4,-2.4) 6(-19.6,-2.4) 8(-18.8,-2.4) 10(-18,-2.4) 12(-17.2,-2.4) 14(-16.4,-2.4) 16(-15.6,-2.4) 18(-14.8,-2.4) 20(-14,-2.4) 22(-13.2,-2.4) 24(-12.4,-2.4) 26(-11.6,-2.4) 28(-10.8,-2.4) 30(-10,-2.4) 32(-9.2,-2.4) 34(-8.4,-2.4) 36(-7.6,-2.4) 38(-6.8,-2.4) 40(-6,-2.4) 42(-5.2,-2.4) 44(-4.4,-2.4) 46(-3.6,-2.4) 48(-2.8,-2.4) 50(-2,-2.4) 52(-1.2,-2.4) 54(-0.4,-2.4) 56(3.6,-2.4) 58(4.4,-2.4) 60(5.2,-2.4) 62(6,-2.4) 64(6.8,-2.4) 66(7.6,-2.4) 68(8.4,-2.4) 70(9.2,-2.4) 72(10,-2.4) 74(10.8,-2.4) 76(11.6,-2.4) 78(12.4,-2.4) 80(13.2,-2.4) 82(14,-2.4) 84(14.8,-2.4) 86(15.6,-2.4) 88(16.4,-2.4) 90(17.2,-2.4) 92(18,-2.4) 94(18.8,-2.4) 96(19.6,-2.4) 98(20.4,-2.4) 100(21.2,-2.4)
IPL1-115-01-XX-D-RA [mil]
  round 60 hole 40 mask+3: 1(-700,-380) 2(-600,-380) 3(-500,-380) 4(-400,-380) 5(-300,-380) 6(-200,-380) 7(-100,-380) 8(0,-380) 9(100,-380) 10(200,-380) 11(300,-380) 12(400,-380) 13(500,-380) 14(600,-380) 15(700,-380) 16(-700,-480) 17(-600,-480) 18(-500,-480) 19(-400,-480) 20(-300,-480) 21(-200,-480) 22(-100,-480) 23(0,-480) 24(100,-480) 25(200,-480) 26(300,-480) 27(400,-480) 28(500,-480) 29(600,-480) 30(700,-480)
  silkscreen extent -800,-520 800,-20
IPL1-120-01-XX-D-RA [mil]
  round 60 hole 40 mask+3: 1(-950,-380) 2(-850,-380) 3(-750,-380) 4(-650,-380) 5(-550,-380) 6(-450,-380) 7(-350,-380) 8(-250,-380) 9(-150,-380) 10(-50,-380) 11(50,-380) 12(150,-380) 13(250,-380) 14(350,-380) 15(450,-380) 16(550,-380) 17(650,-380) 18(750,-380) 19(850,-380) 20(950,-380) 21(-950,-480) 22(-850,-480) 23(-750,-480) 24(-650,-480) 25(-550,-480) 26(-450,-480) 27(-350,-480) 28(-250,-480) 29(-150,-480) 30(-50,-480) 31(50,-480) 32(150,-480) 33(250,-480) 34(350,-480) 35(450,-480) 36(550,-480) 37(650,-480) 38(750,-480) 39(850,-480) 40(950,-480)
  silkscreen extent -1050,-520 1050,-20
NXP-SOT353-1_N [mm] "TSSOP, 5-Leads, Body 2.25x1.35mm, Pitch 0.65mm, IPC Medium Density"
  rect 0.9x0.35 smd: 1(-0.95,0.65) 2(-0.95,0) 3(-0.95,-0.65) 4(0.95,-0.65) 5(0.95,0.65)
  silkscreen extent -1.07,1.25 -0.83,1.5, body extent -0.67,-1.12 0.67,1.13, height 1.1
R78C1510 [mm]
  round 1.575 hole 1.05: 1(0,0) 2(2.54,0) 3(5.08,0)
  silkscreen extent -4.06,-2 8.34,6.5, body extent -3.26,-2 8.34,6.5, height 10.9
RESC1608X55X30NL15T15 [mm] "Chip Resistor, 2-Leads, Body 1.75x0.95mm, IPC Medium Density"
  rect 0.95x0.95 smd: 1(-0.75,0) 2(0.75,0)
  body extent -0.87,-0.48 0.87,0.48, height 0.55
RESC3216X70X50LL20T25_CONFIG [mm] "1206 3-Pin Config Footprint"
  rrect20% 1.1x1.8 smd: 1(-3,0) 2(0,0) 3(3,0)
  silkscreen extent -2.05,-0.9 2.3,0.9, body extent -3.1,-0.8 0.1,1.36, height 2.8
RESCAXE-50P380X160X45-16N [mm] "Chip Array, ConvexE, 16-Leads, Pitch 0,50mm,  Body 3,80x1,60mm,  IPC Medium Density"
  rect 0.7x0.4 smd mask+0.05: 1(-0.9,1.8) 8(-0.9,-1.8) 9(0.9,-1.8) 16(0.9,1.8)
  rect 0.7x0.3 smd mask+0.05: 2(-0.9,1.25) 3(-0.9,0.75) 4(-0.9,0.25) 5(-0.9,-0.25) 6(-0.9,-0.75) 7(-0.9,-1.25) 10(0.9,-1.25) 11(0.9,-0.75) 12(0.9,-0.25) 13(0.9,0.25) 14(0.9,0.75) 15(0.9,1.25)
  silkscreen extent -1.34,1.91 -1.24,2.01, body extent -0.9,-1.95 0.9,1.95, height 0.55
SOIC127P600X175-16N [mm]
  rect 1.55x0.65 smd: 1(-2.725,4.445) 2(-2.725,3.175) 3(-2.725,1.905) 4(-2.725,0.635) 5(-2.725,-0.635) 6(-2.725,-1.905) 7(-2.725,-3.175) 8(-2.725,-4.445) 9(2.725,-4.445) 10(2.725,-3.175) 11(2.725,-1.905) 12(2.725,-0.635) 13(2.725,0.635) 14(2.725,1.905) 15(2.725,3.175) 16(2.725,4.445)
  silkscreen extent -3.5,-4.95 1.6,5.12, body extent -3,-4.95 3,4.95, height 1.75
TI_D-R-PDSO-G16_L [mm] "SOIC, 16-Leads, Body 10x4mm, Pitch 1.27mm, IPC High Density"
  rrect18% 1.25x0.55 smd: 1(-2.625,4.445) 2(-2.625,3.175) 3(-2.625,1.905) 4(-2.625,0.635) 5(-2.625,-0.635) 6(-2.625,-1.905) 7(-2.625,-3.175) 8(-2.625,-4.445) 9(2.625,-4.445) 10(2.625,-3.175) 11(2.625,-1.905) 12(2.625,-0.635) 13(2.625,0.635) 14(2.625,1.905) 15(2.625,3.175) 16(2.625,4.445)
  silkscreen extent -2.75,-5 1.6,5.39, body extent -3,-4.95 3,4.95, height 1.59
TI_DL-R-PDSO-G48_N [mm] "Texas Instruments SSOP, 48-Leads, Body 7.6x16mm, Pitch 0.635mm, IPC Medium Density"
  rrect25% 1.9x0.4 smd: 1(-4.75,7.302) 2(-4.75,6.667) 3(-4.75,6.032) 4(-4.75,5.397) 5(-4.75,4.762) 6(-4.75,4.127) 7(-4.75,3.492) 8(-4.75,2.857) 9(-4.75,2.222) 10(-4.75,1.587) 11(-4.75,0.952) 12(-4.75,0.317) 13(-4.75,-0.318) 14(-4.75,-0.953) 15(-4.75,-1.588) 16(-4.75,-2.223) 17(-4.75,-2.858) 18(-4.75,-3.493) 19(-4.75,-4.128) 20(-4.75,-4.763) 21(-4.75,-5.398) 22(-4.75,-6.033) 23(-4.75,-6.668) 24(-4.75,-7.303) 25(4.75,-7.303) 26(4.75,-6.668) 27(4.75,-6.033) 28(4.75,-5.398) 29(4.75,-4.763) 30(4.75,-4.128) 31(4.75,-3.493) 32(4.75,-2.858) 33(4.75,-2.223) 34(4.75,-1.588) 35(4.75,-0.953) 36(4.75,-0.318) 37(4.75,0.317) 38(4.75,0.952) 39(4.75,1.587) 40(4.75,2.222) 41(4.75,2.857) 42(4.75,3.492) 43(4.75,4.127) 44(4.75,4.762) 45(4.75,5.397) 46(4.75,6.032) 47(4.75,6.667) 48(4.75,7.302)
  silkscreen extent -4.88,-8 3.4,8.2, body extent -5.18,-7.94 5.18,7.94, height 2.6
WL-SMCW_0603 [mm] "SMD Mono-color Chip LED, body 1.6x0.8mm"
  rect 0.8x0.8 smd: 1(-0.8,0) 2(0.8,0)
  silkscreen extent -1.45,-0.65 1.45,0.65, body extent -0.8,-0.4 0.8,0.4, height 0.7

## Part data
C1 C2: library part C_ALEL_47u, "Standard Aluminium electrolyt capacitor.", Manufacturer1=Panasonic, MaxVoltage=35, MPN1=EEE1VA470P, Package=CurrentFootprint, ComponentLink1Description=Datasheet, ComponentLink1URL=https://industrial.panasonic.com/cdbs/www-data/pdf/RDE0000/ABA0000C1145.pdf, created=2019-12-13_Thilo_Wendt, HelpURL=https://industrial.panasonic.com/cdbs/www-data/pdf/RDE0000/ABA0000C1145.pdf, Supplier1=https://de.farnell.com/panasonic/eee1va470p/kondensator-47-f-35v-radial-smd/dp/2326181?st=EEE1VA470P
C3 C4 C5 C6: library part C_X7R_SMALL, "Standard X7R SMD capacitor. This kind of dielectricum should be used for decoupling applications. Bigger capacity is available but not for the given voltage rating.", Manufacturer1=KEMET, MaxVoltage=100, MPN1=C0805C104K3RACTU, Package=CurrentFootprint, ComponentLink1Description=Datasheet, ComponentLink1URL=https://content.kemet.com/datasheets/KEM_C1002_X7R_SMD.pdf, created=2019-12-08_Thilo_Wendt, HelpURL=https://content.kemet.com/datasheets/KEM_C1002_X7R_SMD.pdf, MaxCap=100n, MinCap=10p, Parameter1=3, Parameter1Desc="Voltage Symbol", Parameter2=K, Parameter2Desc="Tolerance Symbol", Supplier1=https://de.farnell.com/w/c/passive-bauelemente/kondensatoren/keramikkondensatoren/keramik-vielschichtkondensatoren-mlcc-smd?brand=kemet&kapazitatstoleranz=posneg-10pc&dielektrikum=x7r
C7 C8 C9 C10 C11 C12 C13 C14 C15 C16 C17 C18 C19 C20 C23 C24: library part C_X7R_MEDIUM, "Standard X7R SMD capacitor. This kind of dielectricum should be used for decoupling applications. Bigger capacity is available but not for the given voltage rating.", Manufacturer1=KEMET, MaxVoltage=50, MPN1="C<pkg[inch]><2d cap [pf] + #zeros><ToleranceSym><VoltageSym>RACTU", Package=CurrentFootprint, ComponentLink1Description=Datasheet, ComponentLink1URL=https://content.kemet.com/datasheets/KEM_C1002_X7R_SMD.pdf, created=2019-12-08_Thilo_Wendt, HelpURL=https://content.kemet.com/datasheets/KEM_C1002_X7R_SMD.pdf, MaxCap=1u, MinCap=10p, Parameter1=5, Parameter1Desc="Voltage Symbol", Parameter2=J, Parameter2Desc="Tolerance Symbol", Supplier1=https://de.farnell.com/w/c/passive-bauelemente/kondensatoren/keramikkondensatoren/keramik-vielschichtkondensatoren-mlcc-smd?brand=kemet&kapazitatstoleranz=posneg-10pc&dielektrikum=x7r
D1: library part LED_Amber, "WL-SMCW SMD Mono-color Chip LED Waterclear, size 0603, Red, 2 V, 140°", Emitting Color=Amber, Forward Voltage="2 V", MPN1=150060AS75000, Package=0603, Supplier Part Number 1=732-150060AS75000CT-ND, ComponentLink1Description=Manufacturer, ComponentLink1URL=http://www.we-online.de, ComponentLink2Description=Datasheet, ComponentLink2URL=http://katalog.we-online.com/led/datasheet/150060AS75000.pdf, created=2020-01-07_Thilo_Wendt, Dominant Wavelength=605nm, Luminous Intensity="250 mcd", MF1="Wuerth Elektronik", Peak Wavelength=610nm, Published Date="Sep. 2017", Size=0603, Supplier 1=Digi-Key, Viewing Angle=140°
D2: library part LED_Blue, "WL-SMCW SMD Mono-color Chip LED Waterclear, size 0603, Blue, 3.2 V, 140°", Emitting Color=Blue, Forward Voltage="3.2 V", MPN=150060BS75000, Package=0603, Supplier Part Number 1=2322069, ComponentLink1Description=Manufacturer, ComponentLink1URL=http://www.we-online.de, ComponentLink2Description=Datasheet, ComponentLink2URL=http://katalog.we-online.com/led/datasheet/150060BS75000.pdf, created=2018_09_06_AGeiger, Dominant Wavelength="470 nm", Luminous Intensity="145 mcd", MF="Wuerth Elektronik", Peak Wavelength="465 nm", Published Date="Sep. 2017", Size=0603, Supplier 1=Farnell, Supplier 2=Mouser, Supplier 3=Digi-Key, Supplier Part Number 2=710-150060BS75000, Supplier Part Number 3=732-4966-1-ND, Viewing Angle=140°
D3: library part LED_Green, "WL-SMCW SMD Mono-color Chip LED Waterclear, size 0603, Green, 3.2 V, 140°", Emitting Color=Green, Forward Voltage="3.2 V", MPN=150060GS75000, Package=0603, Supplier Part Number 1=2322070, ComponentLink1Description=Manufacturer, ComponentLink1URL=http://www.we-online.de, ComponentLink2Description=Datasheet, ComponentLink2URL=http://katalog.we-online.com/led/datasheet/150060GS75000.pdf, created=2018_09_06_AGeiger, Dominant Wavelength="520 nm", Luminous Intensity="430 mcd", MF="Wuerth Elektronik", Peak Wavelength="515 nm", Published Date="Sep. 2017", Size=0603, Supplier 1=Farnell, Supplier 2=Mouser, Supplier 3=Digi-Key, Supplier Part Number 2=710-150060GS75000, Supplier Part Number 3=732-4971-1-ND, Viewing Angle=140°
D4: library part LED_Red, "WL-SMCW SMD Mono-color Chip LED Waterclear, size 0603, Red, 2 V, 140°", Emitting Color=Red, Forward Voltage="2 V", MPN=150060RS75000, Package=0603, Supplier Part Number 1=2322071, ComponentLink1Description=Manufacturer, ComponentLink1URL=http://www.we-online.de, ComponentLink2Description=Datasheet, ComponentLink2URL=http://katalog.we-online.com/led/datasheet/150060RS75000.pdf, created=2018_09_06_AGeiger, Dominant Wavelength="625 nm", Luminous Intensity="250 mcd", MF="Wuerth Elektronik", Peak Wavelength="630 nm", Published Date="Sep. 2017", Size=0603, Supplier 1=Farnell, Supplier 2=Mouser, Supplier 3=Digi-Key, Supplier Part Number 2=710-150060RS75000, Supplier Part Number 3=732-4978-1-ND, Viewing Angle=140°
D5: library part LED_Yellow, "WL-SMCW SMD Mono-color Chip LED Waterclear, size 0603, Red, 2 V, 140°", Emitting Color=Yellow, Forward Voltage="2 V", MPN1=150060YS75000, Package=0603, Supplier Part Number 1=732-5000-1-ND, ComponentLink1Description=Manufacturer, ComponentLink1URL=http://www.we-online.de, ComponentLink2Description=Datasheet, ComponentLink2URL=http://katalog.we-online.com/led/datasheet/150060YS75000.pdf, created=2020-01-07_Thilo_Wendt, Dominant Wavelength=590, Luminous Intensity="250 mcd", MF1="Wuerth Elektronik", Peak Wavelength=595, Published Date="Sep. 2017", Size=0603, Supplier 1=Digi-Key, Supplier 2=Digi-Key, Supplier 3=Digi-Key, Supplier Part Number 2=732-4987-1-ND, Supplier Part Number 3=732-4981-1-ND, Viewing Angle=140°
J1: "Terminal Assembly, Double Row, Right Angle, Thru-Hole, 0.100\" x 0.100\" Pitch, 30 Pins.", MPN1=IPL1-115-01-L-D-RA-K, Package=CurrentFootprint, ComponentLink1Description=Datasheet, ComponentLink1URL=http://suddendocs.samtec.com/catalog_english/ipl1.pdf, created=2019-12-17_Wendy_Xin, HelpURL=https://www.samtec.com/products/ipl1, MF1=SAMTEC, SPN1=2018467, Supplier1=Farnell
J2: "Terminal Assembly, Double Row, Right Angle, Thru-Hole, 0.100\" x 0.100\" Pitch, 40 Pins.", MPN1=IPL1-120-01-L-D-RA-K, Package=CurrentFootprint, created="2019-07-18_Wendy Xin", HelpURL=https://www.samtec.com/products/ipl1, MF1=SAMTEC, SPN1=2018484, Supplier1=Farnell
R1 R2: library part R_0.1W_SMD, "Standard thick film resistor", Manufacturer1=Panasonic, MaxVoltage=100, MPN1=ERJ-U030R00V, Package=CurrentFootprint, ComponentLink1Description=Datasheet, ComponentLink1URL=https://www.mouser.de/datasheet/2/315/AOA0000C334-1314047.pdf, created=2019-12-08_Thilo_Wendt, HelpURL=https://www.mouser.de/datasheet/2/315/AOA0000C334-1314047.pdf, Parameter1=V, Parameter1Desc="Package Method", Parameter2=F, Parameter2Desc="Tolerance Symbol", Parameter3=U03, Parameter3Desc="Package Symbol", Supplier1=https://de.farnell.com/w/search?qualifizierungsstandard-der-automobilindustrie=aec-q200&range=inc-in-stock&st=erju
R1_LS5V_A R1_LS5V_B R2_LS5V_A R2_LS5V_B R3_LS5V_A R3_LS5V_B R4_LS5V_A R4_LS5V_B R29A R29B R29C R29D R29E R30A R30B R30C R30D R30E R31A R31B R31C R31D R31E R32A R32B R32C R32D R32E R33A R33B R33C R33D R33E R34A R34B R34C R34D R34E R35 R36 R37 R38 R39: library part R_0.1W_SMD, "Standard thick film resistor", Manufacturer1=Panasonic, MaxVoltage=100, MPN1=ERJU<pkg><tol><val><pkg_meth>, Package=CurrentFootprint, created=2019-12-08_Thilo_Wendt, HelpURL=https://www.mouser.de/datasheet/2/315/AOA0000C334-1314047.pdf, Parameter1=V, Parameter1Desc="Package Method", Parameter2=F, Parameter2Desc="Tolerance Symbol", Supplier1=https://de.farnell.com/w/search?qualifizierungsstandard-der-automobilindustrie=aec-q200&range=inc-in-stock&st=erju
  R29A R29B R29C R29D R29E R30A R30B R30C R30D R30E R31A R31B R31C R31D R31E R32A R32B R32C R32D R32E R33A R33B R33C R33D R33E R34A R34B R34C R34D R34E R35 R36 R37 R38 R39: ComponentLink1Description=Datasheet, ComponentLink1URL=https://www.mouser.de/datasheet/2/315/AOA0000C334-1314047.pdf
R3 R4 R5 R6 R15 R16 R17 R18 R19 R20 R21: library part 8xR-Array_1_part, "Standard thick film resistor array with 8 resistors", Manufacturer1=Panasonic, MaxVoltage=100, MPN1=EXB2HV<2dig_res+#zeros><tol/jumper>V, Package=CurrentFootprint, ComponentLink1Description=Datasheet, ComponentLink1URL=https://www.mouser.de/datasheet/2/315/AOC0000C14-1108062.pdf, ComponentLink2Description=Landpattern, ComponentLink2URL=https://industrial.panasonic.com/cdbs/www-data/pdf/AOC0000/AOC0000COL4.pdf, created=2020-01-03_Thilo_Wendt, HelpURL=https://www.mouser.de/datasheet/2/315/AOC0000C14-1108062.pdf, Parameter1=V, Parameter1Desc="Package Method", Parameter2=J, Parameter2Desc="Tolerance Symbol", Supplier1=https://de.farnell.com/w/search?range=inc-in-stock&st=exb2hv
R7 R8 R9 R10 R21: library part 8xR-Array, "Standard thick film resistor array with 8 resistors", Manufacturer1=Panasonic, MaxVoltage=100, MPN1=EXB2HV<2dig_res+#zeros><tol/jumper>V, Package=CurrentFootprint, ComponentLink1Description=Datasheet, ComponentLink1URL=https://www.mouser.de/datasheet/2/315/AOC0000C14-1108062.pdf, ComponentLink2Description=Landpattern, ComponentLink2URL=https://industrial.panasonic.com/cdbs/www-data/pdf/AOC0000/AOC0000COL4.pdf, created=2020-01-03_Thilo_Wendt, HelpURL=https://www.mouser.de/datasheet/2/315/AOC0000C14-1108062.pdf, Parameter1=V, Parameter1Desc="Package Method", Parameter2=J, Parameter2Desc="Tolerance Symbol", Supplier1=https://de.farnell.com/w/search?range=inc-in-stock&st=exb2hv
R23: library part R_0.5W_SMD_config, "Solder resistor/jumper between pads 1 and 2 for standard function. Solder resistor between pads 2 and 3 for alternative function", Manufacturer1=Panasonic, MaxVoltage=100, MPN1=ERJU<pkg><tol><val><pkg_meth>, Package=CurrentFootprint, ComponentLink1Description=Datasheet, ComponentLink1URL=https://www.mouser.de/datasheet/2/315/AOA0000C334-1314047.pdf, created=2018_09_04_AGeiger, HelpURL=https://www.mouser.de/datasheet/2/315/AOA0000C334-1314047.pdf, Parameter1=V, Parameter1Desc="Package Method", Parameter2=F, Parameter2Desc="Tolerance Symbol", Supplier1=https://de.farnell.com/w/search?qualifizierungsstandard-der-automobilindustrie=aec-q200&range=inc-in-stock&st=erju
R24: library part R_0.1W_SMD_config, "Solder resistor/jumper between pads 1 and 2 for standard function. Solder resistor between pads 2 and 3 for alternative function", Manufacturer1=Panasonic, MaxVoltage=100, MPN1=ERJU<pkg><tol><val><pkg_meth>, Package=CurrentFootprint, ComponentLink1Description=Datasheet, ComponentLink1URL=https://www.mouser.de/datasheet/2/315/AOA0000C334-1314047.pdf, created=2018_09_04_AGeiger, HelpURL=https://www.mouser.de/datasheet/2/315/AOA0000C334-1314047.pdf, Parameter1=V, Parameter1Desc="Package Method", Parameter2=F, Parameter2Desc="Tolerance Symbol", Supplier1=https://de.farnell.com/w/search?qualifizierungsstandard-der-automobilindustrie=aec-q200&range=inc-in-stock&st=erju
U1: "Swichting Regulator Power Supply with integrated inductor.", Manufacturer1="RECOM Power", MaxVoltage=42, MinVoltage=18, MPN1=R-78C<OutputVoltage>-1.0, OutputVoltage=15, Package=CurrentFootprint, ComponentLink1Description=Datasheet, ComponentLink1URL=https://www.recom-power.com/pdf/Innoline/R-78Cxx-1.0.pdf, created=2019-12-11_Thilo_Wendt, HelpURL=https://www.recom-power.com/pdf/Innoline/R-78Cxx-1.0.pdf
U1_LS5V_A U1_LS5V_B: "Direction controlled 16 channel level shifter with active driver. Voltage range 1.8V to 5V.", Manufacturer1="Texas Instruments", Max Voltage=5.5, Package=CurrentFootprint, created=2019-12-11_Thilo_Wendt, HelpURL=http://www.ti.com/lit/gpn/sn74lvch16t245, MPN1=SN74LVCH16T245, SPN1=595-SN74LVCH16T245GR, SPN2=8143916P, Supplier1=https://www.mouser.com/Search/Refine.aspx?Keyword=595-SN74LVCH16T245GR, Supplier2=http://uk.rs-online.com/web/p/products/8143916P
U2A U2B U2C U2D U2E: "6 Channel 5V to 15V level shifter", Manufacturer1="ON Semiconductor", Max Voltage=18, Package=CurrentFootprint, created=2019-12-11_Thilo_Wendt, HelpURL=http://www.onsemi.com/pub/Collateral/MC14504B-D.PDF, MPN1=MC14504BDR2G, SPN1=863-MC14504BDR2G, SPN2=7737746P, Supplier1=https://www.mouser.com/Search/Refine.aspx?Keyword=863-MC14504BDR2G, Supplier2=http://uk.rs-online.com/web/p/products/7737746P